# Altium PCB 接收端V6.PcbDoc
Units mm, origin at the board's own origin, x right, y up, seen from the top; angles counter-clockwise.
Board outline 134.88 x 23.76 mm, 2 copper layers (Top Layer, Bottom Layer); 9 components, 30 nets, 123 pads, 220 vias.
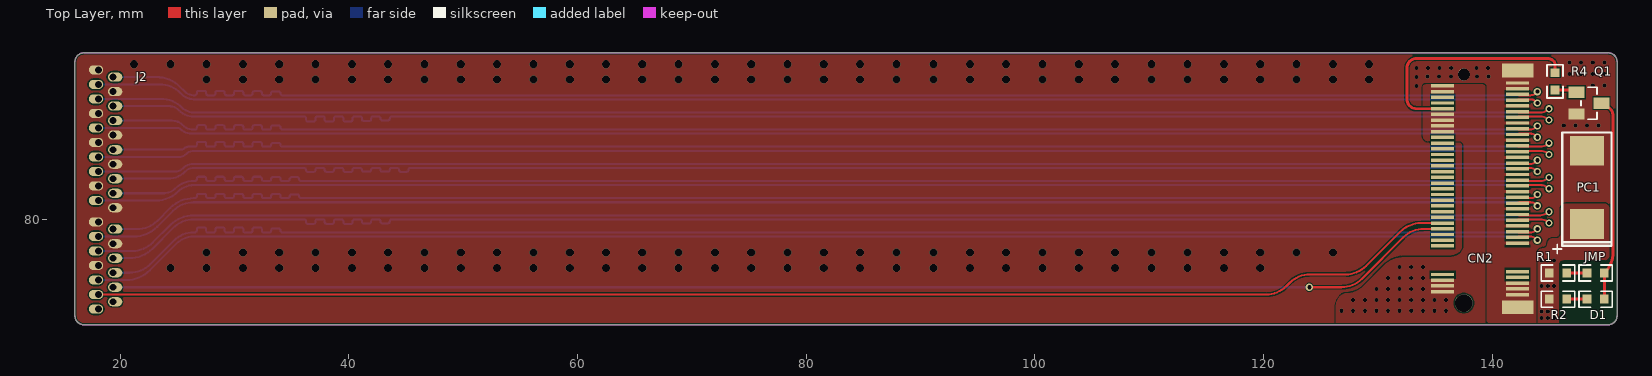
[diagram p0: Top Layer view]
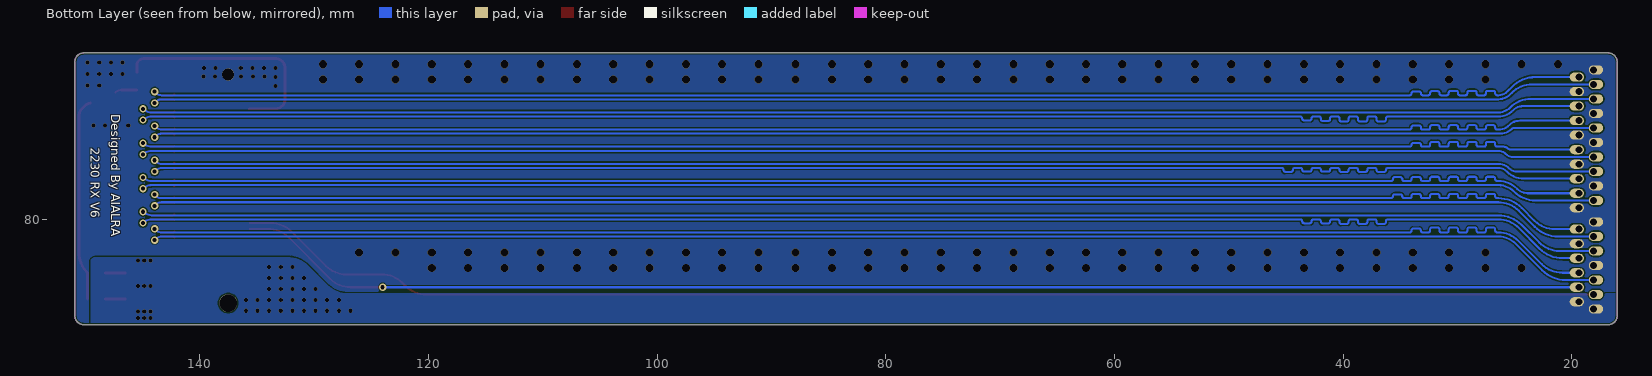
[diagram p1: Bottom Layer view, seen from below]
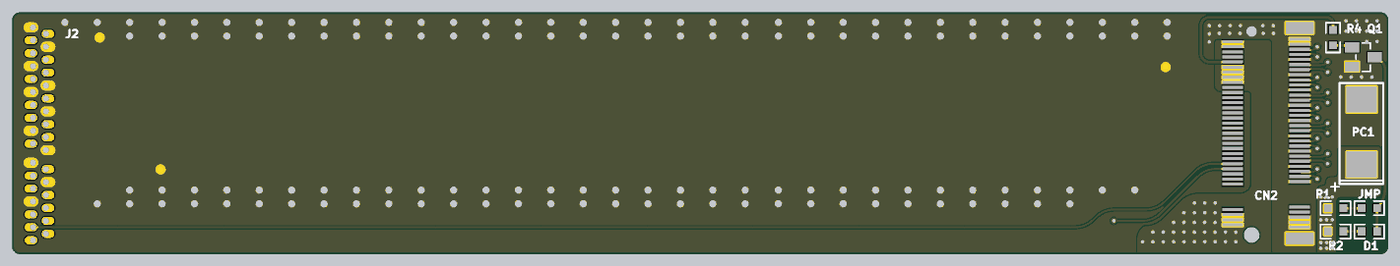
[diagram p2: 3D render of the assembled board from above, using the file's embedded part models]

## Layer stack, top to bottom
Top Solder: solder mask 0.0102, Solder Resist, Dk 3.5
Top Layer: signal copper 0.0356
Dielectric 1: dielectric 0.32, FR-4, Dk 4.8
Bottom Layer: signal copper 0.0356
Bottom Solder: solder mask 0.0102, Solder Resist, Dk 3.5

## Board outline
16.051,71.557 16.051,93.797 cw(c16.813,93.797) 16.813,94.559 150.168,94.559 cw(c150.168,93.797) 150.93,93.797 150.93,71.557 cw(c150.168,71.557) 150.168,70.795 16.813,70.795 cw(c16.813,71.557)

## Design rules (kind name [scope] priority, off if disabled: settings)
Clearance [All] p1: gap=0.127 ignorepadtopadclearanceinfootprint=FALSE except(0.025: Arc-Arc Arc-Track Arc-SMDPad Arc-Via Arc-Text Arc-Hole Track-Track Track-SMDPad Track-Via Track-Text Track-Hole; 0.102: Via-Fill Via-Poly Via-Region; 0.254: SMDPad-Via SMDPad-Text SMDPad-Hole THPad-THPad THPad-Via THPad-Text THPad-Hole Via-Via Via-Text Via-Hole Text-Text Text-Hole)
DiffPairsRouting [All] p1: maxlimit=0.178 minlimit=0.178 mostfreqgap=0.178 toplayer_minwidth=0.178 toplayer_maxwidth=0.178 toplayer_prefwidth=0.178 bottomlayer_minwidth=0.178 bottomlayer_maxwidth=0.178 bottomlayer_prefwidth=0.178 maxuncoupledlength=12.7
HoleSize [All] p1: absolutevalues=TRUE maxlimit=3.81 minlimit=0.025 maxpercent=80.000 minpercent=20.000
HoleToHoleClearance [All] p1: gap=0.203 allowstackedmicrovias=TRUE
MinimumSolderMaskSliver [All] p1: minsoldermaskwidth=0.025
PolygonConnect [All] p1: connectstyle=Direct reliefconductorwidth=0.254 reliefentries=4 polygonreliefangle="90 Angle" airgapwidth=0.254
RoutingVias [All] p1: holewidth=0.711 width=1.27 viastyle="Through Hole" minholewidth=0.711 minwidth=1.27 maxholewidth=0.711 maxwidth=1.27
SilkToSilkClearance [All] p1: silktosilkclearance=0
SilkToSolderMaskClearance [IsPad] p1: minsilkscreentomaskgap=0.076 clearancetoexposedcopper=TRUE
SolderMaskExpansion [All] p1: expansion=0.102 istentingtop=FALSE
Width [All] p1: maxlimit=0.254 minlimit=0.178 preferedwidth=0.178
24 further rules are at their usual default settings.

## Classes and differential pairs
differential pair REFCLK: +REFCLK_P -REFCLK_N
differential pair PET3: +PET3_P -PET3_N
differential pair PET2: +PET2_P -PET2_N
differential pair PET1: +PET1_P -PET1_N
differential pair PET0: +PET0_P -PET0_N
differential pair PER3: +PER3_P -PER3_N
differential pair PER2: +PER2_P -PER2_N
differential pair PER1: +PER1_P -PER1_N
differential pair PER0: +PER0_P -PER0_N

## Components (designator, comment, footprint, x,y, rotation, side; value= is the part's Value field where it differs from the comment)
CN2 "M.2 Socket 3 Key (M)" "m.2 2.3H" 138.924,82.772 r180 top
D1 "LED(G)" 0603C 149.06,73.025 r180 top
J2 "Connector-33" b2b-hole 18.099,82.922 r90 top
JMP "0Ω(jump)" 0603C 149.06,75.311 r0 top
PC1 "Pol-Cap" 7343T 148.298,82.804 r90 top
Q1 "2N3904/2N7002/AO3400" SOT23-3 148.468,90.17 r270 top
R1 "1KΩ" 0603C 145.758,75.311 r0 top
R2 "1KΩ" 0603C 145.758,73.025 r0 top
R4 "4.7KΩ" 0603C 145.504,92.075 r270 top

## Footprints (in the part's own frame and the unit in brackets; to place one, negate y for a bottom-side part, rotate by r counter-clockwise, add the part's x,y. Pads: shape width x height; smd on the part's side, far side on the other; paste and mask are expansions set on the pad)
0603C [mm]
  rect 0.76x0.8 smd: 1(-0.76,0) 2(0.76,0)
  silkscreen extent -1.46,-0.7 1.46,0.7, body extent -0.8,-0.43 0.8,0.43, height 0.48
7343T [mm]
  rect 2.6x3 smd: 1(-3.2,0) 2(3.2,0)
  silkscreen extent -5.8,-2.15 4.8,3, body extent -3.65,-2.02 3.65,2.28, height 1.88
b2b-hole [mm]
  oval 0.8x1.25 hole 0.6 copper offset 0,0.2: 1(-10.762,0) 3(-9.492,0) 5(-8.222,0) 7(-6.952,0) 9(-5.682,0) 11(-4.412,0) 13(-3.142,0) 15(-1.27,0) 17(0,0) 19(1.27,0) 21(2.54,0) 23(3.81,0) 25(5.08,0) 27(6.35,0) 29(7.62,0) 31(8.89,0) 33(10.16,0)
  oval 0.8x1.25 hole 0.6 copper offset 0,-0.2: 2(-10.127,-1.27) 4(-8.857,-1.27) 6(-7.587,-1.27) 8(-6.317,-1.27) 10(-5.047,-1.27) 12(-3.777,-1.27) 14(-1.905,-1.27) 16(-0.635,-1.27) 18(0.635,-1.27) 20(1.905,-1.27) 22(3.175,-1.27) 24(4.445,-1.27) 26(5.715,-1.27) 28(6.985,-1.27) 30(8.255,-1.27) 32(9.525,-1.27)
"m.2 2.3H" [mm]
  rect 2x0.3 smd: 1(-3.304,-9.156) 2(3.247,-8.906) 3(-3.304,-8.656) 4(3.247,-8.406) 5(-3.304,-8.156) 6(3.247,-7.906) 7(-3.304,-7.656) 8(3.247,-7.406) 9(-3.304,-7.156) 10(3.247,-6.906) 11(-3.304,-6.656) 12(3.247,-6.406) 13(-3.304,-6.156) 14(3.247,-5.906) 15(-3.304,-5.656) 16(3.247,-5.406) 17(-3.304,-5.156) 18(3.247,-4.906) 19(-3.304,-4.656) 20(3.247,-4.406) 21(-3.304,-4.156) 22(3.247,-3.906) 23(-3.304,-3.656) 24(3.247,-3.406) 25(-3.304,-3.156) 26(3.247,-2.906) 27(-3.304,-2.656) 28(3.247,-2.406) 29(-3.304,-2.156) 30(3.247,-1.906) 31(-3.304,-1.656) 32(3.247,-1.406) 33(-3.304,-1.156) 34(3.247,-0.906) 35(-3.304,-0.656) 36(3.247,-0.406) 37(-3.304,-0.156) 38(3.247,0.094) 39(-3.304,0.344) 40(3.247,0.594) 41(-3.304,0.844) 42(3.247,1.094) 43(-3.304,1.344) 44(3.247,1.594) 45(-3.304,1.844) 46(3.247,2.094) 47(-3.304,2.344) 48(3.247,2.594) 49(-3.304,2.844) 50(3.247,3.094) 51(-3.304,3.344) 52(3.247,3.594) 53(-3.304,3.844) 54(3.247,4.094) 55(-3.304,4.344) 56(3.247,4.594) 57(-3.304,4.844) 57(-3.304,4.844) 58(3.247,5.094) 67(-3.304,7.344) 68(3.247,7.594) 69(-3.304,7.844) 70(3.247,8.094) 71(-3.304,8.344) 72(3.247,8.594) 73(-3.304,8.844) 74(3.247,9.094) 75(-3.304,9.344)
  round 1.05 hole 1.05 unplated mask+0: 59(1.397,-9.906)
  rect 2.75x1.2 smd: 61(-3.304,-10.255) 65(-3.304,10.445)
  round 1.55 hole 1.55 unplated mask+0: 63(1.397,10.094)
  body extent -4.38,-10.57 4.32,11.33, height 3.09
SOT23-3 [mm]
  rect 1x1.4 smd: 1(-0.95,-1.1) 2(0.95,-1.1) 3(0,1.1)
  silkscreen extent -1.4,-0.7 1.4,0.7, body extent -1.5,-1.25 1.5,1.25, height 1.05

## Part data
D1: library part LED
JMP R1 R2 R4: library part Resistor

## Free pads (board coordinates)
  round 1 on Top Solder: 1(24.638,92.083) 1(30.604,79.121) 1(129.104,89.179)

## Via types
v1: diameter 0.711, hole 0.711, Top Layer to Bottom Layer, tented both sides, 131 vias
v2: diameter 0.356, hole 0.356, Top Layer to Bottom Layer, tented both sides, 70 vias
v3: diameter 0.635, hole 0.356, Top Layer to Bottom Layer, tented both sides, 19 vias

## Nets (pads, with @x,y where several pads share a name; then routed paths per layer and width w, separated by ;. In a path a pad name is that pad's centre, name@x,y a point inside that pad or via, vN(x,y) a via of type N, cw(c..) or ccw(c..) an arc to the next point about the centre after c; other vN are vias at no path point)
+3.3V: CN2.2 CN2.4 CN2.12 CN2.14 CN2.16 CN2.18 CN2.70 CN2.72 CN2.74 J2.1 J2.2 PC1.1 R1.1 R2.1
  other v2: 144.31,71.374 144.869,71.374 145.428,71.374 144.31,71.933 144.869,71.933 145.428,71.933 126.835,72.009 127.851,72.009 128.867,72.009 129.883,72.009 130.899,72.009 131.915,72.009 132.931,72.009 133.947,72.009 134.963,72.009 135.979,72.009 127.851,72.962 128.867,72.962 129.883,72.962 130.899,72.962 131.915,72.962 132.931,72.962 133.947,72.962 134.963,72.962 135.979,72.962 129.883,73.914 130.899,73.914 131.915,73.914 132.931,73.914 133.947,73.914 144.31,74.168 144.869,74.168 145.428,74.168 130.899,74.867 131.915,74.867 132.931,74.867 133.947,74.867 131.915,75.819 132.931,75.819 133.947,75.819 144.31,76.403 144.869,76.403 145.428,76.403
GND: CN2.1 CN2.3 CN2.9 CN2.15 CN2.21 CN2.27 CN2.33 CN2.39 CN2.45 CN2.51 CN2.57 CN2.59 CN2.61 CN2.65 CN2.71 CN2.73 CN2.75 J2.7 J2.10 J2.13 J2.14 J2.17 J2.20 J2.23 J2.24 J2.27 J2.30 J2.33 PC1.2 Q1.2
  other v1: 24.398,75.743 27.573,75.743 30.748,75.743 33.923,75.743 37.098,75.743 40.273,75.743 43.448,75.743 46.623,75.743 49.798,75.743 52.973,75.743 56.148,75.743 59.323,75.743 62.498,75.743 65.673,75.743 68.848,75.743 72.023,75.743 75.198,75.743 78.373,75.743 81.548,75.743 84.723,75.743 87.898,75.743 91.148,75.743 94.323,75.743 97.498,75.743 100.673,75.743 103.848,75.743 107.023,75.743 110.198,75.743 113.373,75.743 116.548,75.743 119.723,75.743 27.573,77.089 30.748,77.089 33.923,77.089 37.098,77.089 40.273,77.089 43.448,77.089 46.623,77.089 49.798,77.089 52.973,77.089 56.148,77.089 59.323,77.089 62.498,77.089 65.673,77.089 68.848,77.089 72.023,77.089 75.198,77.089 78.373,77.089 81.548,77.089 84.723,77.089 87.898,77.089 91.148,77.089 94.323,77.089 97.498,77.089 100.673,77.089 103.848,77.089 107.023,77.089 110.198,77.089 113.373,77.089 116.548,77.089 119.723,77.089 122.898,77.089 126.073,77.089 27.573,92.227 30.748,92.227 33.923,92.227 37.098,92.227 40.273,92.227 43.448,92.227 46.623,92.227 49.798,92.227 52.973,92.227 56.148,92.227 59.323,92.227 62.498,92.227 65.673,92.227 68.848,92.227 72.023,92.227 75.198,92.227 78.373,92.227 81.548,92.227 84.723,92.227 87.898,92.227 91.148,92.227 94.323,92.227 97.498,92.227 100.673,92.227 103.848,92.227 107.023,92.227 110.198,92.227 113.373,92.227 116.548,92.227 119.723,92.227 122.898,92.227 126.073,92.227 129.248,92.227 21.223,93.574 24.398,93.574 27.573,93.574 30.748,93.574 33.923,93.574 37.098,93.574 40.273,93.574 43.448,93.574 46.623,93.574 49.798,93.574 52.973,93.574 56.148,93.574 59.323,93.574 62.498,93.574 65.673,93.574 68.848,93.574 72.023,93.574 75.198,93.574 78.373,93.574 81.548,93.574 84.723,93.574 87.898,93.574 91.148,93.574 94.323,93.574 97.498,93.574 100.673,93.574 103.848,93.574 107.023,93.574 110.198,93.574 113.373,93.574 116.548,93.574 119.723,93.574 122.898,93.574 126.073,93.574 129.248,93.574
  other v2: 146.266,88.201 147.282,88.201 148.298,88.201 149.314,88.201 133.379,91.656 148.806,91.694 149.822,91.694 133.379,92.456 134.357,92.494 135.373,92.494 136.389,92.494 138.665,92.494 139.681,92.494 146.774,92.71 147.79,92.71 148.806,92.71 149.822,92.71 133.379,93.256 134.395,93.256 135.411,93.256 136.427,93.256 138.627,93.256 139.643,93.256 146.774,93.726 147.79,93.726 148.806,93.726 149.822,93.726
NetCN2_10: CN2.10 R4.1 | length 20.7
  Top Layer w0.254: CN2.10 133.379,89.678 cw(c133.379,90.491) 132.804,89.916 cw(c133.417,90.529) 132.55,90.529 132.55,93.218 cw(c133.417,93.218) 132.804,93.831 cw(c133.379,93.256) 133.379,94.069 144.855,94.069 cw(c144.855,93.331) 145.377,93.853 cw(c145.07,93.546) 145.504,93.546 R4.1
NetCN2_38: CN2.38
NetCN2_50: CN2.50 J2.3 | length 119.7
  Top Layer w0.178: J2.3 120.219,73.43 ccw(c120.219,75.97) 122.015,74.174 122.281,74.44 cw(c124.077,72.644) 124.077,75.184 127.18,75.184 ccw(c127.18,77.724) 128.976,75.928 131.982,78.934 cw(c133.778,77.138) 133.778,79.678 CN2.50
NetCN2_52: CN2.52 J2.4 | length 118.2
  Top Layer w0.178: v3(124.017,74.065) 126.823,74.065 ccw(c126.823,76.605) 128.619,74.809 132.244,78.434 cw(c134.04,76.638) 134.04,79.178 CN2.52
  Bottom Layer w0.178: J2.4 v3(124.017,74.065)
NetCN2_54: CN2.54
NetCN2_68: CN2.68
NetD1_1: D1.1 JMP.2 Q1.3 | length 17.9
  Top Layer w0.254: Q1.3 cw(c149.568,89.557) Q1.3@150.002,89.99 ; D1.1 JMP.2 149.84,75.331 ccw(c148.044,77.127) 150.584,77.127 150.584,89.049 ccw(c149.717,89.049) 150.33,89.662 Q1.3@150.002,89.99
NetD1_2: D1.2 R2.2 | length 1.8
  Top Layer w0.254: R2.2 D1.2
NetJMP_1: JMP.1 R1.2 | length 1.8
  Top Layer w0.254: R1.2 JMP.1
NetQ1_1: Q1.1 R4.2 | length 1.9
  Top Layer w0.178: Q1.1@146.897,91.315 cw(c146.897,90.649) Q1.1
  Top Layer w0.254: R4.2 Q1.1@146.897,91.315
PER0_N: CN2.41 J2.12 | length 130.2
  Top Layer w0.178: CN2.41 ccw(c142.402,82.102) 142.402,81.856 143.345,81.856 ccw(c143.345,82.577) 143.855,82.067 v3(143.959,82.171)
  Bottom Layer w0.178: J2.12 21.481,79.145 ccw(c21.481,81.685) 23.277,79.889 24.396,81.008 cw(c26.443,78.96) 26.443,81.856 26.532,81.856 ccw(c26.532,82.034) 26.71,82.034 26.71,82.07 cw(c26.873,82.07) 26.873,82.232 27.36,82.232 cw(c27.36,82.07) 27.523,82.07 27.523,82.018 ccw(c27.685,82.018) 27.685,81.856 28.173,81.856 ccw(c28.173,82.018) 28.336,82.018 28.336,82.07 cw(c28.498,82.07) 28.498,82.232 28.986,82.232 cw(c28.986,82.07) 29.149,82.07 29.149,82.018 ccw(c29.311,82.018) 29.311,81.856 29.799,81.856 ccw(c29.799,82.018) 29.961,82.018 29.961,82.07 cw(c30.124,82.07) 30.124,82.232 30.612,82.232 cw(c30.612,82.07) 30.774,82.07 30.774,82.018 ccw(c30.937,82.018) 30.937,81.856 31.424,81.856 ccw(c31.424,82.018) 31.587,82.018 31.587,82.07 cw(c31.749,82.07) 31.749,82.232 32.237,82.232 cw(c32.237,82.07) 32.4,82.07 32.4,82.018 ccw(c32.562,82.018) 32.562,81.856 33.05,81.856 ccw(c33.05,82.018) 33.213,82.018 33.213,82.055 cw(c33.375,82.055) 33.375,82.218 33.863,82.218 cw(c33.863,82.055) 34.025,82.055 34.025,82.018 ccw(c34.188,82.018) 34.188,81.856 34.676,81.856 ccw(c34.676,82.018) 34.838,82.018 34.838,82.034 cw(c35.001,82.034) 35.001,82.196 35.488,82.196 cw(c35.488,82.034) 35.651,82.034 ccw(c35.829,82.034) 35.829,81.856 38.981,81.856 143.345,81.856 ccw(c143.345,82.577) 143.855,82.067 v3(143.959,82.171)
PER0_P: CN2.43 J2.11 | length 128.8
  Top Layer w0.178: CN2.43 cw(c142.402,81.254) 142.402,81.5 143.345,81.5 cw(c143.345,80.779) 143.855,81.289 v3(143.959,81.185)
  Bottom Layer w0.178: J2.11 21.201,78.51 ccw(c21.201,81.405) 23.249,79.358 24.647,80.756 cw(c26.443,78.96) 26.443,81.5 143.345,81.5 cw(c143.345,80.779) 143.855,81.289 v3(143.959,81.185)
PER1_N: CN2.29 J2.19 | length 128
  Top Layer w0.178: CN2.29 ccw(c142.402,85.102) 142.402,84.856 143.345,84.856 ccw(c143.345,85.577) 143.855,85.067 v3(143.959,85.171)
  Bottom Layer w0.178: J2.19 24.84,84.192 ccw(c24.84,85.082) 25.47,84.452 cw(c26.443,83.479) 26.443,84.856 143.345,84.856 ccw(c143.345,85.577) 143.855,85.067 v3(143.959,85.171)
PER1_P: CN2.31 J2.18 | length 129.2
  Top Layer w0.178: CN2.31 cw(c142.402,84.254) 142.402,84.5 143.345,84.5 cw(c143.345,83.779) 143.855,84.289 v3(143.959,84.185)
  Bottom Layer w0.178: J2.18 24.166,83.557 ccw(c24.166,85.756) 25.721,84.201 cw(c26.443,83.479) 26.443,84.5 35.193,84.5 36.095,84.5 cw(c36.095,84.322) 36.272,84.322 36.272,84.315 ccw(c36.435,84.315) 36.435,84.153 36.923,84.153 ccw(c36.923,84.315) 37.085,84.315 37.085,84.338 cw(c37.248,84.338) 37.248,84.5 37.736,84.5 cw(c37.736,84.338) 37.898,84.338 37.898,84.315 ccw(c38.061,84.315) 38.061,84.153 38.548,84.153 ccw(c38.548,84.315) 38.711,84.315 38.711,84.338 cw(c38.873,84.338) 38.873,84.5 39.361,84.5 cw(c39.361,84.338) 39.524,84.338 39.524,84.315 ccw(c39.686,84.315) 39.686,84.153 40.174,84.153 ccw(c40.174,84.315) 40.336,84.315 40.336,84.338 cw(c40.499,84.338) 40.499,84.5 40.987,84.5 cw(c40.987,84.338) 41.149,84.338 41.149,84.334 ccw(c41.312,84.334) 41.312,84.172 41.8,84.172 ccw(c41.8,84.334) 41.962,84.334 41.962,84.338 cw(c42.125,84.338) 42.125,84.5 42.612,84.5 cw(c42.612,84.338) 42.775,84.338 ccw(c42.937,84.338) 42.937,84.175 43.425,84.175 ccw(c43.425,84.338) 43.588,84.338 cw(c43.75,84.338) 43.75,84.5 44.238,84.5 cw(c44.238,84.338) 44.4,84.338 44.4,84.322 ccw(c44.563,84.322) 44.563,84.16 45.051,84.16 ccw(c45.051,84.322) 45.213,84.322 cw(c45.391,84.322) 45.391,84.5 47,84.5 143.345,84.5 cw(c143.345,83.779) 143.855,84.289 v3(143.959,84.185)
PER2_N: CN2.17 J2.26 | length 129.1
  Top Layer w0.178: CN2.17 ccw(c142.402,88.102) 142.402,87.856 143.345,87.856 ccw(c143.345,88.577) 143.855,88.067 v3(143.959,88.171)
  Bottom Layer w0.178: J2.26 24.558,88.637 cw(c24.558,87.368) 25.455,88.265 ccw(c26.443,89.253) 26.443,87.856 26.532,87.856 ccw(c26.532,88.034) 26.71,88.034 26.71,88.077 cw(c26.873,88.077) 26.873,88.239 27.36,88.239 cw(c27.36,88.077) 27.523,88.077 27.523,88.018 ccw(c27.686,88.018) 27.686,87.856 28.173,87.856 ccw(c28.173,88.018) 28.336,88.018 28.336,88.077 cw(c28.498,88.077) 28.498,88.239 28.986,88.239 cw(c28.986,88.077) 29.149,88.077 29.149,88.018 ccw(c29.311,88.018) 29.311,87.856 29.799,87.856 ccw(c29.799,88.018) 29.961,88.018 29.961,88.077 cw(c30.124,88.077) 30.124,88.239 30.612,88.239 cw(c30.612,88.077) 30.774,88.077 30.774,88.018 ccw(c30.937,88.018) 30.937,87.856 31.424,87.856 ccw(c31.424,88.018) 31.587,88.018 31.587,88.077 cw(c31.75,88.077) 31.75,88.239 32.237,88.239 cw(c32.237,88.077) 32.4,88.077 32.4,88.018 ccw(c32.562,88.018) 32.562,87.856 33.05,87.856 ccw(c33.05,88.018) 33.213,88.018 33.213,88.06 cw(c33.375,88.06) 33.375,88.222 33.863,88.222 cw(c33.863,88.06) 34.025,88.06 34.025,88.034 ccw(c34.203,88.034) 34.203,87.856 35.941,87.856 36.03,87.856 143.345,87.856 ccw(c143.345,88.577) 143.855,88.067 v3(143.959,88.171)
PER2_P: CN2.19 J2.25 | length 127.9
  Top Layer w0.178: CN2.19 cw(c142.402,87.254) 142.402,87.5 143.345,87.5 cw(c143.345,86.779) 143.855,87.289 v3(143.959,87.185)
  Bottom Layer w0.178: J2.25@18.099,88.014 24.99,88.014 cw(c24.99,87.571) 25.303,87.884 ccw(c26.23,88.811) 26.23,87.5 143.345,87.5 cw(c143.345,86.779) 143.855,87.289 v3(143.959,87.185)
PER3_N: CN2.5 J2.32 | length 129.9
  Top Layer w0.178: CN2.5 ccw(c142.402,91.102) 142.402,90.856 143.345,90.856 ccw(c143.345,91.577) 143.855,91.067 v3(143.959,91.171)
  Bottom Layer w0.178: J2.32 23.186,92.447 cw(c23.186,89.551) 25.234,91.599 25.646,91.186 ccw(c26.443,91.983) 26.443,90.856 26.532,90.856 ccw(c26.532,91.034) 26.71,91.034 26.71,91.086 cw(c26.873,91.086) 26.873,91.249 27.36,91.249 cw(c27.36,91.086) 27.523,91.086 27.523,91.018 ccw(c27.685,91.018) 27.685,90.856 28.173,90.856 ccw(c28.173,91.018) 28.336,91.018 28.336,91.086 cw(c28.498,91.086) 28.498,91.249 28.986,91.249 cw(c28.986,91.086) 29.149,91.086 29.149,91.018 ccw(c29.311,91.018) 29.311,90.856 29.799,90.856 ccw(c29.799,91.018) 29.961,91.018 29.961,91.086 cw(c30.124,91.086) 30.124,91.249 30.612,91.249 cw(c30.612,91.086) 30.774,91.086 30.774,91.018 ccw(c30.937,91.018) 30.937,90.856 31.424,90.856 ccw(c31.424,91.018) 31.587,91.018 31.587,91.053 cw(c31.749,91.053) 31.749,91.215 32.237,91.215 cw(c32.237,91.053) 32.4,91.053 32.4,91.018 ccw(c32.562,91.018) 32.562,90.856 33.05,90.856 ccw(c33.05,91.018) 33.213,91.018 33.213,91.034 cw(c33.375,91.034) 33.375,91.196 33.863,91.196 cw(c33.863,91.034) 34.025,91.034 ccw(c34.203,91.034) 34.203,90.856 35.448,90.856 143.345,90.856 ; v3(143.959,91.171) v3@143.855,91.067 ; 143.345,90.856 ccw(c143.345,91.577) v3@143.855,91.067 ; 143.345,90.856 ccw(c143.345,91.577) v3@143.855,91.067
PER3_P: CN2.7 J2.31 | length 128.7
  Top Layer w0.178: CN2.7 cw(c142.402,90.254) 142.402,90.5 143.345,90.5 cw(c143.345,89.779) 143.855,90.289 v3(143.959,90.185)
  Bottom Layer w0.178: J2.31 23.466,91.812 cw(c23.466,89.272) 25.262,91.068 25.395,90.935 ccw(c26.443,91.983) 26.443,90.5 143.345,90.5 ; v3(143.959,90.185) v3@143.855,90.289 ; 143.345,90.5 cw(c143.345,89.779) v3@143.855,90.289 ; 143.345,90.5 cw(c143.345,89.779) v3@143.855,90.289
PET0_N: CN2.47 J2.9 | length 130.9
  Top Layer w0.178: CN2.47 ccw(c142.402,80.602) 142.402,80.356 144.214,80.356 ccw(c144.214,81.432) v3(144.975,80.671)
  Bottom Layer w0.178: J2.9 21.076,77.24 ccw(c21.076,79.78) 22.872,77.984 24.396,79.508 cw(c26.443,77.46) 26.443,80.356 144.214,80.356 ccw(c144.214,81.432) v3(144.975,80.671)
PET0_P: CN2.49 J2.8 | length 132
  Top Layer w0.178: CN2.49 cw(c142.402,79.754) 142.402,80 144.214,80 cw(c144.214,78.924) v3(144.975,79.685)
  Bottom Layer w0.178: J2.8 20.796,76.605 ccw(c20.796,79.5) 22.844,77.453 24.647,79.256 cw(c26.443,77.46) 26.443,80 35.193,80 36.095,80 cw(c36.095,79.822) 36.273,79.822 36.273,79.768 ccw(c36.435,79.768) 36.435,79.605 36.923,79.605 ccw(c36.923,79.768) 37.085,79.768 37.085,79.838 cw(c37.248,79.838) 37.248,80 37.736,80 cw(c37.736,79.838) 37.898,79.838 37.898,79.768 ccw(c38.061,79.768) 38.061,79.605 38.548,79.605 ccw(c38.548,79.768) 38.711,79.768 38.711,79.838 cw(c38.873,79.838) 38.873,80 39.361,80 cw(c39.361,79.838) 39.524,79.838 39.524,79.768 ccw(c39.686,79.768) 39.686,79.605 40.174,79.605 ccw(c40.174,79.768) 40.337,79.768 40.337,79.838 cw(c40.499,79.838) 40.499,80 40.987,80 cw(c40.987,79.838) 41.149,79.838 41.149,79.819 ccw(c41.312,79.819) 41.312,79.656 41.8,79.656 ccw(c41.8,79.819) 41.962,79.819 41.962,79.838 cw(c42.125,79.838) 42.125,80 42.612,80 cw(c42.612,79.838) 42.775,79.838 42.775,79.822 ccw(c42.937,79.822) 42.937,79.66 43.425,79.66 ccw(c43.425,79.822) 43.588,79.822 cw(c43.766,79.822) 43.766,80 44.479,80 144.214,80 cw(c144.214,78.924) v3(144.975,79.685)
PET1_N: CN2.35 J2.16 | length 131.5
  Top Layer w0.178: CN2.35 ccw(c142.402,83.602) 142.402,83.356 144.214,83.356 ccw(c144.214,84.432) v3(144.975,83.671)
  Bottom Layer w0.178: J2.16 23.862,82.287 ccw(c23.862,83.611) 24.799,82.674 cw(c26.443,81.03) 26.443,83.356 26.532,83.356 ccw(c26.532,83.534) 26.71,83.534 26.71,83.568 cw(c26.873,83.568) 26.873,83.73 27.36,83.73 cw(c27.36,83.568) 27.523,83.568 27.523,83.518 ccw(c27.685,83.518) 27.685,83.356 28.173,83.356 ccw(c28.173,83.518) 28.336,83.518 28.336,83.568 cw(c28.498,83.568) 28.498,83.73 28.986,83.73 cw(c28.986,83.568) 29.149,83.568 29.149,83.518 ccw(c29.311,83.518) 29.311,83.356 29.799,83.356 ccw(c29.799,83.518) 29.961,83.518 29.961,83.568 cw(c30.124,83.568) 30.124,83.73 30.612,83.73 cw(c30.612,83.568) 30.774,83.568 30.774,83.518 ccw(c30.937,83.518) 30.937,83.356 31.424,83.356 ccw(c31.424,83.518) 31.587,83.518 31.587,83.568 cw(c31.749,83.568) 31.749,83.73 32.237,83.73 cw(c32.237,83.568) 32.4,83.568 32.4,83.518 ccw(c32.562,83.518) 32.562,83.356 33.05,83.356 ccw(c33.05,83.518) 33.213,83.518 33.213,83.546 cw(c33.375,83.546) 33.375,83.708 33.863,83.708 cw(c33.863,83.546) 34.025,83.546 34.025,83.518 ccw(c34.188,83.518) 34.188,83.356 34.676,83.356 ccw(c34.676,83.518) 34.838,83.518 34.838,83.534 cw(c35.001,83.534) 35.001,83.696 35.488,83.696 cw(c35.488,83.534) 35.651,83.534 ccw(c35.829,83.534) 35.829,83.356 36.604,83.356 144.214,83.356 ccw(c144.214,84.432) v3(144.975,83.671)
PET1_P: CN2.37 J2.15 | length 130.2
  Top Layer w0.178: CN2.37 cw(c142.402,82.754) 142.402,83 144.214,83 cw(c144.214,81.924) v3(144.975,82.685)
  Bottom Layer w0.178: J2.15 23.188,81.652 ccw(c23.188,84.285) 25.05,82.423 cw(c26.443,81.03) 26.443,83 144.214,83 cw(c144.214,81.924) v3(144.975,82.685)
PET2_N: CN2.23 J2.22 | length 131.8
  Top Layer w0.178: CN2.23 ccw(c142.402,86.602) 142.402,86.356 144.214,86.356 ccw(c144.214,87.432) v3(144.975,86.671)
  Bottom Layer w0.178: J2.22 25.323,86.097 ccw(c25.323,86.562) 25.652,86.233 cw(c25.949,85.937) 25.949,86.356 26.532,86.356 ccw(c26.532,86.534) 26.71,86.534 26.71,86.626 cw(c26.873,86.626) 26.873,86.788 27.36,86.788 cw(c27.36,86.626) 27.523,86.626 27.523,86.518 ccw(c27.686,86.518) 27.686,86.356 28.173,86.356 ccw(c28.173,86.518) 28.336,86.518 28.336,86.626 cw(c28.498,86.626) 28.498,86.788 28.986,86.788 cw(c28.986,86.626) 29.149,86.626 29.149,86.518 ccw(c29.311,86.518) 29.311,86.356 29.799,86.356 ccw(c29.799,86.518) 29.961,86.518 29.961,86.626 cw(c30.124,86.626) 30.124,86.788 30.612,86.788 cw(c30.612,86.626) 30.774,86.626 30.774,86.518 ccw(c30.937,86.518) 30.937,86.356 31.424,86.356 ccw(c31.424,86.518) 31.587,86.518 31.587,86.604 cw(c31.75,86.604) 31.75,86.766 32.237,86.766 cw(c32.237,86.604) 32.4,86.604 32.4,86.518 ccw(c32.562,86.518) 32.562,86.356 33.05,86.356 ccw(c33.05,86.518) 33.213,86.518 33.213,86.534 cw(c33.375,86.534) 33.375,86.696 33.863,86.696 cw(c33.863,86.534) 34.025,86.534 ccw(c34.203,86.534) 34.203,86.356 37.676,86.356 ; 37.215,86.356 37.676,86.356 ; v3(144.975,86.671) cw(c144.214,87.432) 144.214,86.356 37.676,86.356
PET2_P: CN2.25 J2.21 | length 130
  Top Layer w0.178: CN2.25 cw(c142.402,85.754) 142.402,86 144.214,86 cw(c144.214,84.924) v3(144.975,85.685)
  Bottom Layer w0.178: J2.21 25.143,85.462 ccw(c25.143,86.361) 25.779,85.725 cw(c26.443,85.061) 26.443,86 144.214,86 cw(c144.214,84.924) v3(144.975,85.685)
PET3_N: CN2.11 J2.29 | length 130.1
  Top Layer w0.178: CN2.11 ccw(c142.402,89.602) 142.402,89.356 144.214,89.356 ccw(c144.214,90.432) v3(144.975,89.671)
  Bottom Layer w0.178: J2.29 23.58,90.542 cw(c23.58,87.972) 25.398,89.789 ccw(c26.443,90.835) 26.443,89.356 144.214,89.356 ccw(c144.214,90.432) v3(144.975,89.671)
PET3_P: CN2.13 J2.28 | length 131.6
  Top Layer w0.178: CN2.13 cw(c142.402,88.754) 142.402,89 144.214,89 cw(c144.214,87.924) v3(144.975,88.685)
  Bottom Layer w0.178: J2.28 24.255,89.907 cw(c24.255,88.646) 25.146,89.538 ccw(c26.443,90.835) 26.443,89 35.193,89 36.095,89 cw(c36.095,88.822) 36.273,88.822 36.273,88.725 ccw(c36.435,88.725) 36.435,88.563 36.923,88.563 ccw(c36.923,88.725) 37.085,88.725 37.085,88.838 cw(c37.248,88.838) 37.248,89 37.736,89 cw(c37.736,88.838) 37.898,88.838 37.898,88.725 ccw(c38.061,88.725) 38.061,88.563 38.548,88.563 ccw(c38.548,88.725) 38.711,88.725 38.711,88.838 cw(c38.873,88.838) 38.873,89 39.361,89 cw(c39.361,88.838) 39.524,88.838 39.524,88.725 ccw(c39.686,88.725) 39.686,88.563 40.174,88.563 ccw(c40.174,88.725) 40.337,88.725 40.337,88.838 cw(c40.499,88.838) 40.499,89 40.987,89 cw(c40.987,88.838) 41.149,88.838 41.149,88.767 ccw(c41.312,88.767) 41.312,88.604 41.8,88.604 ccw(c41.8,88.767) 41.962,88.767 41.962,88.838 cw(c42.125,88.838) 42.125,89 42.612,89 cw(c42.612,88.838) 42.775,88.838 42.775,88.822 ccw(c42.937,88.822) 42.937,88.66 43.425,88.66 ccw(c43.425,88.822) 43.588,88.822 cw(c43.766,88.822) 43.766,89 45.48,89 ; 45.353,89 45.48,89 ; v3(144.975,88.685) ccw(c144.214,87.924) 144.214,89 45.48,89
REFCLK_N: CN2.53 J2.6 | length 130.7
  Top Layer w0.178: CN2.53 ccw(c142.402,79.102) 142.402,78.856 143.345,78.856 ccw(c143.345,79.577) 143.855,79.067 v3(143.959,79.171)
  Bottom Layer w0.178: J2.6 20.835,75.335 ccw(c20.835,77.875) 22.631,76.079 24.676,78.124 cw(c26.443,76.356) 26.443,78.856 26.532,78.856 ccw(c26.532,79.034) 26.71,79.034 26.71,79.128 cw(c26.873,79.128) 26.873,79.29 27.36,79.29 cw(c27.36,79.128) 27.523,79.128 27.523,79.018 ccw(c27.685,79.018) 27.685,78.856 28.173,78.856 ccw(c28.173,79.018) 28.336,79.018 28.336,79.128 cw(c28.498,79.128) 28.498,79.29 28.986,79.29 cw(c28.986,79.128) 29.149,79.128 29.149,79.018 ccw(c29.311,79.018) 29.311,78.856 29.799,78.856 ccw(c29.799,79.018) 29.961,79.018 29.961,79.128 cw(c30.124,79.128) 30.124,79.29 30.612,79.29 cw(c30.612,79.128) 30.774,79.128 30.774,79.018 ccw(c30.937,79.018) 30.937,78.856 31.424,78.856 ccw(c31.424,79.018) 31.587,79.018 31.587,79.128 cw(c31.749,79.128) 31.749,79.29 32.237,79.29 cw(c32.237,79.128) 32.4,79.128 32.4,79.018 ccw(c32.562,79.018) 32.562,78.856 33.05,78.856 ccw(c33.05,79.018) 33.213,79.018 33.213,79.038 cw(c33.375,79.038) 33.375,79.201 33.863,79.201 cw(c33.863,79.038) 34.025,79.038 34.025,79.034 ccw(c34.203,79.034) 34.203,78.856 38.719,78.856 39.638,78.856 ; 39.5,78.856 39.638,78.856 ; v3@143.947,79.179 cw(c143.345,79.577) 143.345,78.856 39.638,78.856
REFCLK_P: CN2.55 J2.5 | length 129.2
  Top Layer w0.178: CN2.55 cw(c142.402,78.254) 142.402,78.5 143.345,78.5 cw(c143.345,77.779) 143.855,78.289 v3(143.959,78.185)
  Bottom Layer w0.178: J2.5 20.555,74.7 ccw(c20.555,77.595) 22.603,75.548 24.927,77.872 cw(c26.443,76.356) 26.443,78.5 143.345,78.5 cw(c143.345,77.779) 143.855,78.289 v3(143.959,78.185)
pads on no net: CN2.6 CN2.8 CN2.20 CN2.22 CN2.24 CN2.26 CN2.28 CN2.30 CN2.32 CN2.34 CN2.36 CN2.40 CN2.42 CN2.44 CN2.46 CN2.48 CN2.56 CN2.58 CN2.63 CN2.67 CN2.69

## Polygon pours and split planes (outlines as drawn)
+3.3V on Bottom Layer "+3.3V_L02_P042" (solid, remove dead copper, pour order 42): 127.053,73.533 ccw(c127.053,76.073) 128.849,74.277 130.536,75.964 cw(c132.332,74.168) 132.332,76.708 149.145,76.708 cw(c149.145,76.299) 149.434,76.588 149.494,76.528 cw(c149.316,76.35) 149.568,76.35 149.568,70.446 cw(c147.823,70.446) 149.057,69.212 cw(c147.531,70.737) 147.531,68.58 11.513,68.58 cw(c11.513,70.314) 10.287,69.088 cw(c10.9,69.701) 10.033,69.701 10.033,71.702 cw(c10.467,71.702) 10.16,72.009 10.94,72.789 cw(c12.736,70.993) 12.736,73.533
GND on Bottom Layer "GND_L02_P041" (solid, remove dead copper, pour order 41): 5.461,113.284 0,107.823 0,65.532 22.86,42.672 183.134,42.672 193.04,52.578 193.04,101.092 174.244,119.888 12.7,119.888 5.588,112.776
GND on Top Layer "GND_L01_P040" (solid, remove dead copper, pour order 40): 0,90.424 0,68.072 8.509,59.563 152.527,59.563 163.83,70.866 160.401,74.295 160.401,102.743 12.319,102.743 7.239,97.663
+3.3V on Top Layer "+3.3V_L01_P015" (solid, remove dead copper, pour order 15): 126.708,69.469 126.726,69.451 ccw(c128.522,71.247) 128.522,68.707 139.027,68.707 ccw(c138.098,69.636) 139.412,69.636 139.412,91.563 ccw(c139.13,91.545) 139.112,91.828 134.243,91.828 ccw(c134.225,91.549) 133.947,91.567 133.947,87.309 ccw(c134.381,87.309) 134.074,87.003 ccw(c134.497,87.426) 134.497,86.827 137.186,86.827 cw(c137.186,86.559) 137.376,86.749 cw(c137.069,86.442) 137.503,86.442 137.503,77.702 cw(c136.636,77.702) 137.249,77.089 cw(c136.329,78.009) 136.329,76.708 132.332,76.708 ccw(c132.332,74.168) 130.536,75.964 128.734,74.162 cw(c127.216,75.679) 127.216,73.533 127.183,73.533 ccw(c127.183,72.999) 126.806,73.377 ccw(c127.961,72.221) 126.327,72.221 126.327,70.389 ccw(c127.628,70.389)
+3.3V on Top Layer "+3.3V_L01_P039" (solid, remove dead copper, pour order 39): 143.98,70.233 143.982,70.231 143.982,69.649 ccw(c144.416,69.649) 144.109,69.342 cw(c144.416,69.035) 144.416,69.469 145.506,69.469 145.743,69.706 ccw(c145.585,69.864) 145.809,69.864 145.809,75.992 cw(c146.242,75.992) 145.936,76.299 cw(c146.242,75.992) 146.242,76.426 149.812,76.426 ccw(c149.812,76.859) 150.119,76.553 ccw(c149.812,76.859) 150.246,76.859 150.246,80.94 ccw(c149.812,80.94) 150.119,81.247 ccw(c149.812,80.94) 149.812,81.374 146.446,81.374 ccw(c146.446,80.94) 146.139,81.247 ccw(c146.446,80.94) 146.012,80.94 146.012,80.889 146.012,78.771 cw(c145.578,78.771) 145.885,78.464 cw(c145.578,78.771) 145.578,78.337 145.281,78.337 ccw(c145.281,77.904) 144.974,78.21 ccw(c145.281,77.904) 144.847,77.904 cw(c144.414,77.904) 144.72,77.597 cw(c144.414,77.904) 144.414,77.47 ccw(c144.414,77.036) 144.107,77.343 ccw(c144.414,77.036) 143.98,77.036

## Keep-outs
Keep-Out Layer:
  the board outline again, w0.064

## Other copper
Top Layer:
  pour cut-out: 134.55,75.528 134.55,75.328 136.804,75.328 136.804,75.528
  pour cut-out: 143.355,75.577 143.355,75.778 141.101,75.778 141.101,75.578
  pour cut-out: 143.355,77.578 143.355,77.778 141.101,77.778 141.101,77.578
  pour cut-out: 136.804,77.327 136.804,77.528 134.55,77.528 134.55,77.328
  pour cut-out: 136.804,87.327 136.804,87.528 134.55,87.528 134.55,87.328
  pour cut-out: 143.355,88.078 143.355,88.278 141.101,88.278 141.101,88.078
  pour cut-out: 143.355,88.578 143.355,88.778 141.101,88.778 141.101,88.578
  pour cut-out: 143.355,74.578 143.355,74.778 141.101,74.778 141.101,74.578
  pour cut-out: 143.355,83.578 143.355,83.778 141.101,83.778 141.101,83.578
  pour cut-out: 143.355,84.078 143.355,84.278 141.101,84.278 141.101,84.078
  pour cut-out: 143.355,82.578 143.355,82.778 141.101,82.778 141.101,82.578
  pour cut-out: 143.355,82.078 143.355,82.278 141.101,82.278 141.101,82.078
  pour cut-out: 143.355,85.578 143.355,85.778 141.101,85.778 141.101,85.578
  pour cut-out: 143.355,85.078 143.355,85.278 141.101,85.278 141.101,85.078
  pour cut-out: 143.355,78.078 143.355,78.278 141.101,78.278 141.101,78.078
  pour cut-out: 136.804,74.827 136.804,75.028 134.55,75.028 134.55,74.828
  pour cut-out: 136.804,89.827 136.804,90.028 134.55,90.028 134.55,89.828
  pour cut-out: 136.804,90.827 136.804,91.028 134.55,91.028 134.55,90.828
  pour cut-out: 143.355,80.578 143.355,80.778 141.101,80.778 141.101,80.578
  pour cut-out: 143.355,79.078 143.355,79.278 141.101,79.278 141.101,79.078
  pour cut-out: 143.355,81.078 143.355,81.278 141.101,81.278 141.101,81.078
  pour cut-out: 143.355,79.578 143.355,79.778 141.101,79.778 141.101,79.578
  pour cut-out: 143.355,86.578 143.355,86.778 141.101,86.778 141.101,86.578
  pour cut-out: 143.355,87.078 143.355,87.278 141.101,87.278 141.101,87.078
  pour cut-out: 143.355,89.578 143.355,89.778 141.101,89.778 141.101,89.578
  pour cut-out: 143.355,91.078 143.355,91.278 141.101,91.278 141.101,91.078
  pour cut-out: 143.355,90.078 143.355,90.278 141.101,90.278 141.101,90.078

## Silkscreen, mask and mechanical layers (free items; w line width, h text height)
Bottom Overlay:
  text "Designed By AIALRA" at 147.76,89.205 h0.76 r90
  text "2230 RX V6" at 149.53,86.284 h0.76 r90
Mechanical 1:
  the board outline again, w0.064